# Altium PCB MEM_M_V1.PcbDoc
Units mm, origin at the board's own origin, x right, y up, seen from the top; angles counter-clockwise.
Board outline 11.37 x 19 mm, 2 copper layers (Top Layer, Bottom Layer); 10 components, 13 nets, 48 pads, 11 vias.
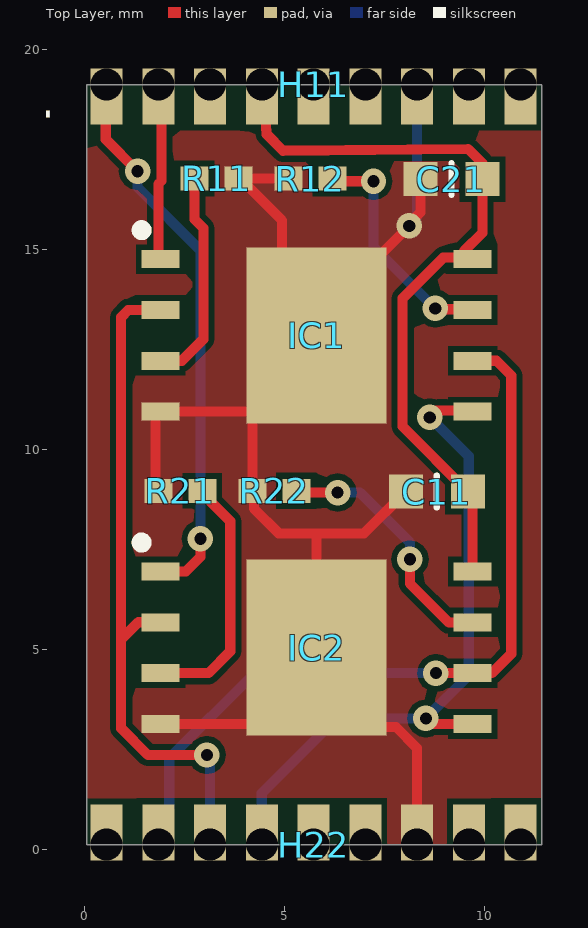
[diagram p0: Top Layer view]
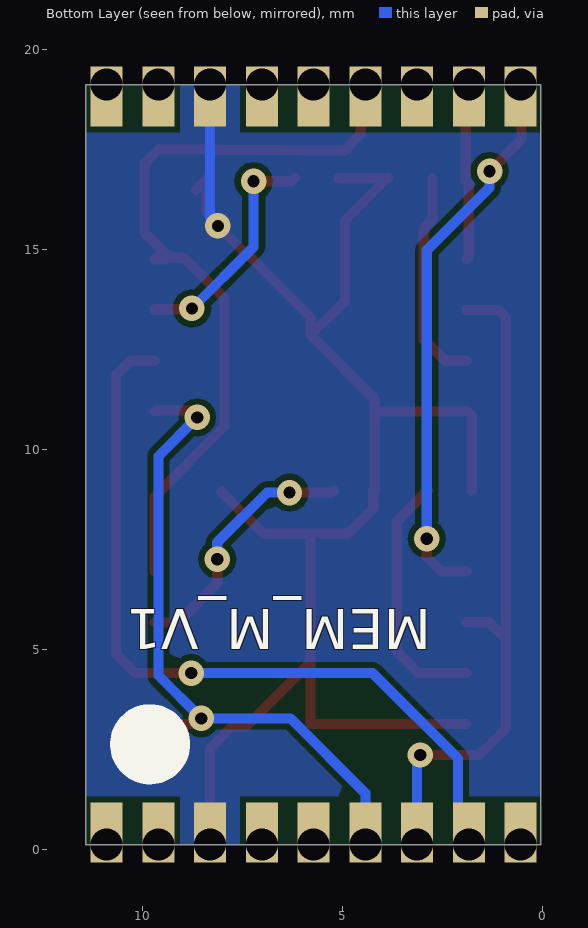
[diagram p1: Bottom Layer view, seen from below]
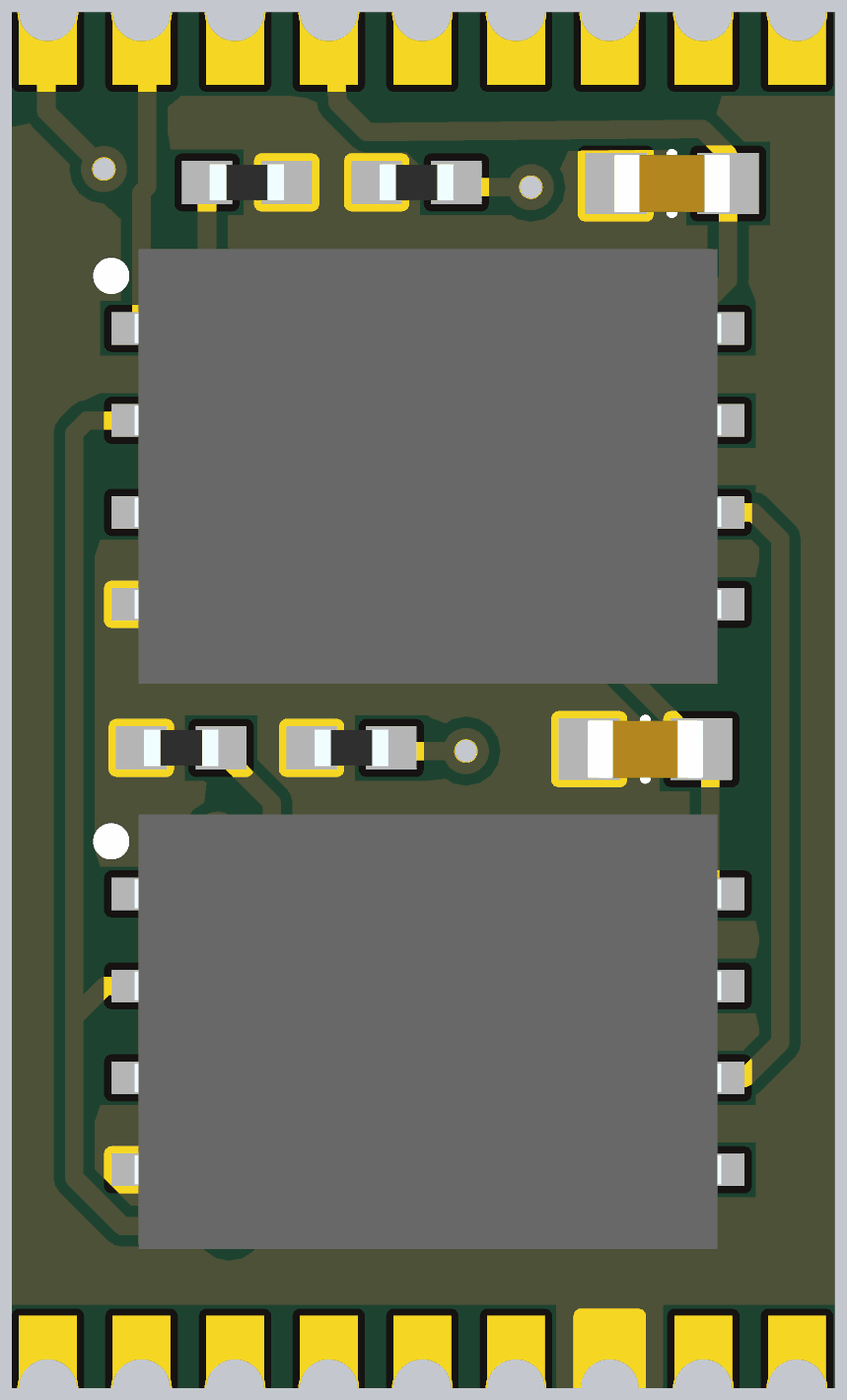
[diagram p2: 3D render of the assembled board from above, using the file's embedded part models]

## Layer stack, top to bottom
Top Solder: solder mask 0.0102, Solder Resist, Dk 3.5
Top Layer: signal copper 0.0356
Dielectric 1: dielectric 0.32, FR-4, Dk 4.8
Bottom Layer: signal copper 0.0356
Bottom Solder: solder mask 0.0102, Solder Resist, Dk 3.5

## Board outline
0.06,0.13 0.06,19.13 11.434,19.13 11.434,0.13

## Design rules (kind name [scope] priority, off if disabled: settings)
AssemblyTestPointUsage SilkToBoardRegionClearance_1 [All] p2:
AssemblyTestPointUsage SilkToBoardRegionClearance [All] p3:
Clearance [All] p1: gap=0.152 ignorepadtopadclearanceinfootprint=FALSE except(0: Arc-Hole Track-Hole SMDPad-Hole THPad-Hole Via-Hole Fill-Hole Poly-Hole Region-Hole Text-Hole)
HoleSize [All] p1: absolutevalues=TRUE maxlimit=6.35 minlimit=0.3 maxpercent=80.000 minpercent=20.000
MatchedLengths DiffPair_DIFF100MatchedLengths [InDifferentialPairClass('DIFF100')] p1: tolerance=0.152 checknetsindiffpair=TRUE checkdiffpairvsdiffpair=FALSE checkxsignals=FALSE checkothers=FALSE usedelayunits=FALSE
MinimumSolderMaskSliver [All] p1: minsoldermaskwidth=0.1
MinimumSolderMaskSliver SilkscreenOverComponentPads_2 [All] p2: minsoldermaskwidth=0.254
MinimumSolderMaskSliver SilkToSolderMaskClearance_1 [IsPad] p3: minsoldermaskwidth=0.254
MinimumSolderMaskSliver SilkscreenOverComponentPads_1 [All] p4: minsoldermaskwidth=0.254
MinimumSolderMaskSliver SilkToSolderMaskClearance [IsPad] p5: minsoldermaskwidth=0.254
MinimumSolderMaskSliver SilkscreenOverComponentPads [All] p6: minsoldermaskwidth=0.254
PolygonConnect [All] p1: connectstyle=Direct reliefconductorwidth=0.254 reliefentries=4 polygonreliefangle="90 Angle" airgapwidth=0.254
RoomDefinition MEM_M_V1 [InComponentClass('MEM_M_V1')] p1: confinementstyle=ConfineIn formatcopy=TRUE lockcomponents=FALSE outline -0.069,-0.487 11.494,-0.487 11.494,19.722 -0.069,19.722
RoutingVias [All] p1: holewidth=0.305 width=0.635 viastyle="Through Hole" minholewidth=0.305 minwidth=0.635 maxholewidth=0.711 maxwidth=1.27
SilkToBoardRegionClearance SilkToBoardRegionClearance_2 [All] p1:
SilkToSolderMaskClearance SilkToSolderMaskClearance_2 [IsPad] p1: minsilkscreentomaskgap=0.254 clearancetoexposedcopper=TRUE
SolderMaskExpansion [All] p1: expansion=0.102
Width [All] p1: maxlimit=2.54 minlimit=0.152 preferedwidth=0.254
26 further rules are at their usual default settings.

## Components (designator, comment, footprint, x,y, rotation, side; value= is the part's Value field where it differs from the comment)
C11 "0.10µF" SMD-0603C 8.815,8.954 r270 top
C21 "0.10µF" SMD-0603C 9.183,16.765 r270 top
H11 "CASTELLATED 9 pin" "CASTELLATED 9 pin" 10.911,19.13 r180 top
H22 "CASTELLATED 9 pin" "CASTELLATED 9 pin" 0.56,0.13 r0 top
IC1 "TH58CVG3S0HRAIJ" SON127P800X600X80-9N-D 5.812,12.859 r0 top
IC2 "TH58CVG3S0HRAIJ" SON127P800X600X80-9N-D 5.812,5.051 r0 top
R11 "RK73Z1ETTP" RESC1005X40N 3.31,16.78 r180 top
R12 "RK73Z1ETTP" RESC1005X40N 5.654,16.78 r0 top
R21 "RK73Z1ETTP" RESC1005X40N 2.403,8.972 r0 top
R22 "RK73Z1ETTP" RESC1005X40N 4.755,8.972 r0 top

## Footprints (in the part's own frame and the unit in brackets; to place one, negate y for a bottom-side part, rotate by r counter-clockwise, add the part's x,y. Pads: shape width x height; smd on the part's side, far side on the other; paste and mask are expansions set on the pad)
"CASTELLATED 9 pin" [mm]
  rect 0.8x1.4 / inner rect 0.8x1.5 / far side rect 0.8x1.5 hole 0.8 copper offset 0,0.3: 1(0,0) 2(1.294,0) 3(2.588,0) 4(3.881,0) 5(5.175,0) 6(6.469,0) 7(7.763,0) 8(9.056,0) 9(10.35,0)
RESC1005X40N [mm]
  rect 0.7x0.6 smd: 1(-0.55,0) 2(0.55,0)
  body extent -0.51,-0.25 0.51,0.25, height 0.4
SMD-0603C [mm]
  rect 0.85x0.85 smd: 1(0,0.775) 2(0,-0.775)
  silkscreen extent -0.4,0 0.4,0, body extent -0.4,-0.8 0.4,0.8, height 0.9
SON127P800X600X80-9N-D [mm]
  rect 0.95x0.45 smd: 1(-3.9,1.905) 2(-3.9,0.635) 3(-3.9,-0.635) 4(-3.9,-1.905) 5(3.9,-1.905) 6(3.9,-0.635) 7(3.9,0.635) 8(3.9,1.905)
  rect 3.5x4.4 smd: 9(0,0)
  silkscreen extent -4.5,2.51 -4.25,2.75, body extent -4.05,-3 4.05,3, height 0.8

## Part data
C11 C21: library part GCJ188R72A104KA01D, "CAP CER 0.1UF 100V X7R 0603", Digi-Key Part Number=490-13420-1-ND, Manufacturer="Murata Electronics North America", Operating Temperature="-55°C ~ 125°C", Package / Case="0603 (1608 Metric)", Ratings=AEC-Q200, Supplier Part Number 1=81-GCJ188R72A104KA1D, Temperature Coefficient=X7R, Tolerance=±10%, Voltage=100V, @ qty=0, Applications="Automotive, Boardflex Sensitive", Datasheets=http://www.murata.com/~/media/webrenewal/support/library/catalog/products/capacitor/mlcc/c03e.ashx, Factory Stock=0, Features="Soft Termination", Height - Seated (Max)=-, Image=//media.digikey.com/Renders/Murata%20Renders/0603%28LQG18%29.jpg, Lead Spacing=-, Lead Style=-, Minimum Quantity=1, Mounting Type="Surface Mount, MLCC", Packaging="Cut Tape (CT)", Part Number=GCJ188R72A104KA01D, Part Status=Active, Quantity Available=2728, Series=GCJ, Size / Dimension="0.063\" L x 0.031\" W (1.60mm x 0.80mm)", Supplier 1=Mouser, Thickness (Max)="0.035\" (0.90mm)", Unit Price (USD)=0,23
IC1 IC2: "Integrated Circuit", Manufacturer_Name="Kioxia America", Supplier Part Number 1=757-TH58CVG3S0HRAIJ, Datasheet Link=https://business.kioxia.com/info/docget.jsp?did=58602&prodName=TH58CVG3S0HRAIJ, Height=0.8mm, Manufacturer_Part_Number=TH58CVG3S0HRAIJ, Supplier 1=Mouser
R11 R12 R21 R22: "Resistor", Manufacturer_Name="KOA Speer", Supplier Part Number 1=660-RK73Z1ETTP, Height=0.4mm, Manufacturer_Part_Number=RK73Z1ETTP, Supplier 1=Mouser

## Via types
v1: diameter 0.635, hole 0.305, Top Layer to Bottom Layer, tented both sides, 11 vias

## Nets (pads, with @x,y where several pads share a name; then routed paths per layer and width w, separated by ;. In a path a pad name is that pad's centre, name@x,y a point inside that pad or via, vN(x,y) a via of type N, cw(c..) or ccw(c..) an arc to the next point about the centre after c; other vN are vias at no path point)
B3: H22.2 IC1.6 IC2.6 | length 20
  Top Layer w0.254: v1(8.792,4.416) v1@8.975,4.416 ; v1@8.95,4.441 v1@8.975,4.416 ; IC1.6 10.31,12.224 10.677,11.857 10.677,4.902 10.191,4.416 IC2.6 v1@8.975,4.416
  Bottom Layer w0.254: H22.2 1.854,0.78 2.127,1.053 2.127,2.284 4.259,4.416 v1(8.792,4.416)
B4: H22.4 IC1.5 IC2.5 | length 16.9
  Top Layer w0.254: v1(8.543,3.285) 8.682,3.146 IC2.5 ; v1(8.642,10.81) 8.81,10.978 9.688,10.978 IC1.5
  Bottom Layer w0.254: H22.4 4.441,1.414 6.312,3.285 v1(8.543,3.285) 9.613,4.355 9.613,9.839 v1(8.642,10.81)
B5: H22.3 IC1.2 IC2.2 | length 17.2
  Top Layer w0.254: IC2.2 1.355,5.686 0.925,5.256 ; IC1.2 1.103,13.494 0.925,13.316 0.925,5.256 ; v1(3.069,2.37) 1.593,2.37 0.925,3.038 0.925,5.256
  Bottom Layer w0.254: v1(3.069,2.37) 3.148,2.291 H22.3
D1: H11.8 IC1.1 | length 4.5
  Top Layer w0.254: H11.8 1.932,19.053 1.932,16.718 1.855,16.64 1.855,14.822 IC1.1
D2: H11.9 IC2.1 | length 14.1
  Top Layer w0.254: H11.9 0.747,18.944 0.747,18.474 0.54,18.267 0.54,17.76 v1(1.335,16.965) ; IC2.1 2.542,6.956 2.905,7.319 v1(2.905,7.774)
  Bottom Layer w0.254: v1(1.335,16.965) 1.335,16.561 2.905,14.991 v1(2.905,7.774)
D7: H22.1
GND: C11.2 C21.2 H11.3 H22.7 IC1.4 IC1.9 IC2.4 IC2.9 R11.1 R12.1 R21.1 R22.1 | length 43.3
  Top Layer w0.254: R21.1@1.781,8.985 1.781,10.856 1.879,10.954 IC1.4 IC1.9@4.189,10.954 ; IC2.4 5.812,3.146 IC2.9@5.812,4.692 ; R11.1 R11.1@3.902,16.78 ; R11.1@3.87,16.793 3.889,16.793 R11.1@3.902,16.78 ; R22.1 R22.1@4.205,8.985 ; R12.1@5.104,16.793 5.091,16.78 R11.1@3.902,16.78 ; C11.2 6.996,7.91 5.859,7.91 ; H22.7 8.323,2.54 7.794,3.069 7.435,3.069 IC2.9@5.812,4.692 ; C21.2@8.674,16.499 C21.2 8.408,15.935 8.128,15.655 v1(8.128,15.596) 7.464,14.932 7.435,14.932 5.812,13.309 IC1.9 ; R11.1@3.902,16.78 4.947,15.735 4.947,13.724 IC1.9 ; R22.1@4.205,8.985 4.242,8.985 4.242,8.531 4.863,7.91 5.859,7.91 ; R22.1@4.205,8.985 4.205,11.252 IC1.9 ; IC2.9@5.812,4.692 IC2.9 5.812,7.863 5.859,7.91
  Bottom Layer w0.254: v1(8.128,15.596) 8.325,15.793 8.325,19.128 H11.3
NetIC1_3: IC1.3 R11.2 | length 5.4
  Top Layer w0.254: IC1.3 2.441,12.224 2.981,12.764 2.981,15.542 2.76,15.763 R11.2
NetIC1_7: IC1.7 R12.2 | length 5.8
  Top Layer w0.254: R12.2@6.204,16.793 6.283,16.714 v1(7.234,16.714) ; v1(8.776,13.533) 8.795,13.514 9.693,13.514 IC1.7
  Bottom Layer w0.254: v1(7.234,16.714) 7.234,15.075 v1(8.776,13.533)
NetIC2_3: IC2.3 R21.2 | length 6.3
  Top Layer w0.254: IC2.3 3.108,4.416 3.654,4.962 3.654,8.212 R21.2@2.881,8.985
NetIC2_7: IC2.7 R22.2 | length 6.5
  Top Layer w0.254: R22.2@5.225,8.985 5.282,8.928 v1(6.337,8.928) ; v1(8.143,7.262) 8.143,6.656 9.121,5.678 IC2.7@9.712,5.678
  Bottom Layer w0.254: v1(6.337,8.928) 6.899,8.928 8.143,7.684 v1(8.143,7.262)
VCC2: C11.1 C21.1 H11.6 IC1.8 IC2.8 | length 19.7
  Top Layer w0.254: H11.6 4.55,19.022 4.55,18.005 4.562,17.993 4.562,17.886 4.972,17.476 9.599,17.518 9.954,17.17 C21.1 9.958,15.426 9.504,14.972 IC1.8@9.549,14.927 ; IC1.8@9.364,14.862 IC1.8@9.424,14.802 ; IC2.8 9.712,8.832 C11.1 7.962,10.582 7.962,13.79 8.974,14.802 IC1.8@9.424,14.802 ; IC1.8@9.424,14.802 IC1.8@9.549,14.927 ; IC1.8@9.424,14.802 9.462,14.764 IC1.8 IC1.8@9.549,14.927
VCC3: H11.7
pads on no net: H11.1 H11.2 H11.4 H11.5 H22.5 H22.6 H22.8 H22.9

## Polygon pours and split planes (outlines as drawn)
GND on Bottom Layer "GND_L02_P002" (solid, pour order 2): 0.06,19.133 0.062,19.131 11.436,19.131 11.436,0.13 0.06,0.13
no net on Bottom Layer "NONET_L02_P000" (solid, pour order 0): 0.314,18.291
GND on Top Layer "GND_L01_P004" (solid, pour order 4): 0.059,19.133 0.059,0.13 11.436,0.13 11.436,19.13

## Silkscreen, mask and mechanical layers (free items; w line width, h text height)
Bottom Overlay:
  circle w1: c9.823,2.637 r0.5
  text "MEM_M_V1" at 2.792,6.009 h1 r180
Mechanical 1:
  pour cut-out: 5.399,12.138
  lines w0.2: 0.06,0.13 0.06,19.13 11.434,19.13 11.434,0.13 0.06,0.13